# EAGLE board keyb (EAGLE 7.2.0)
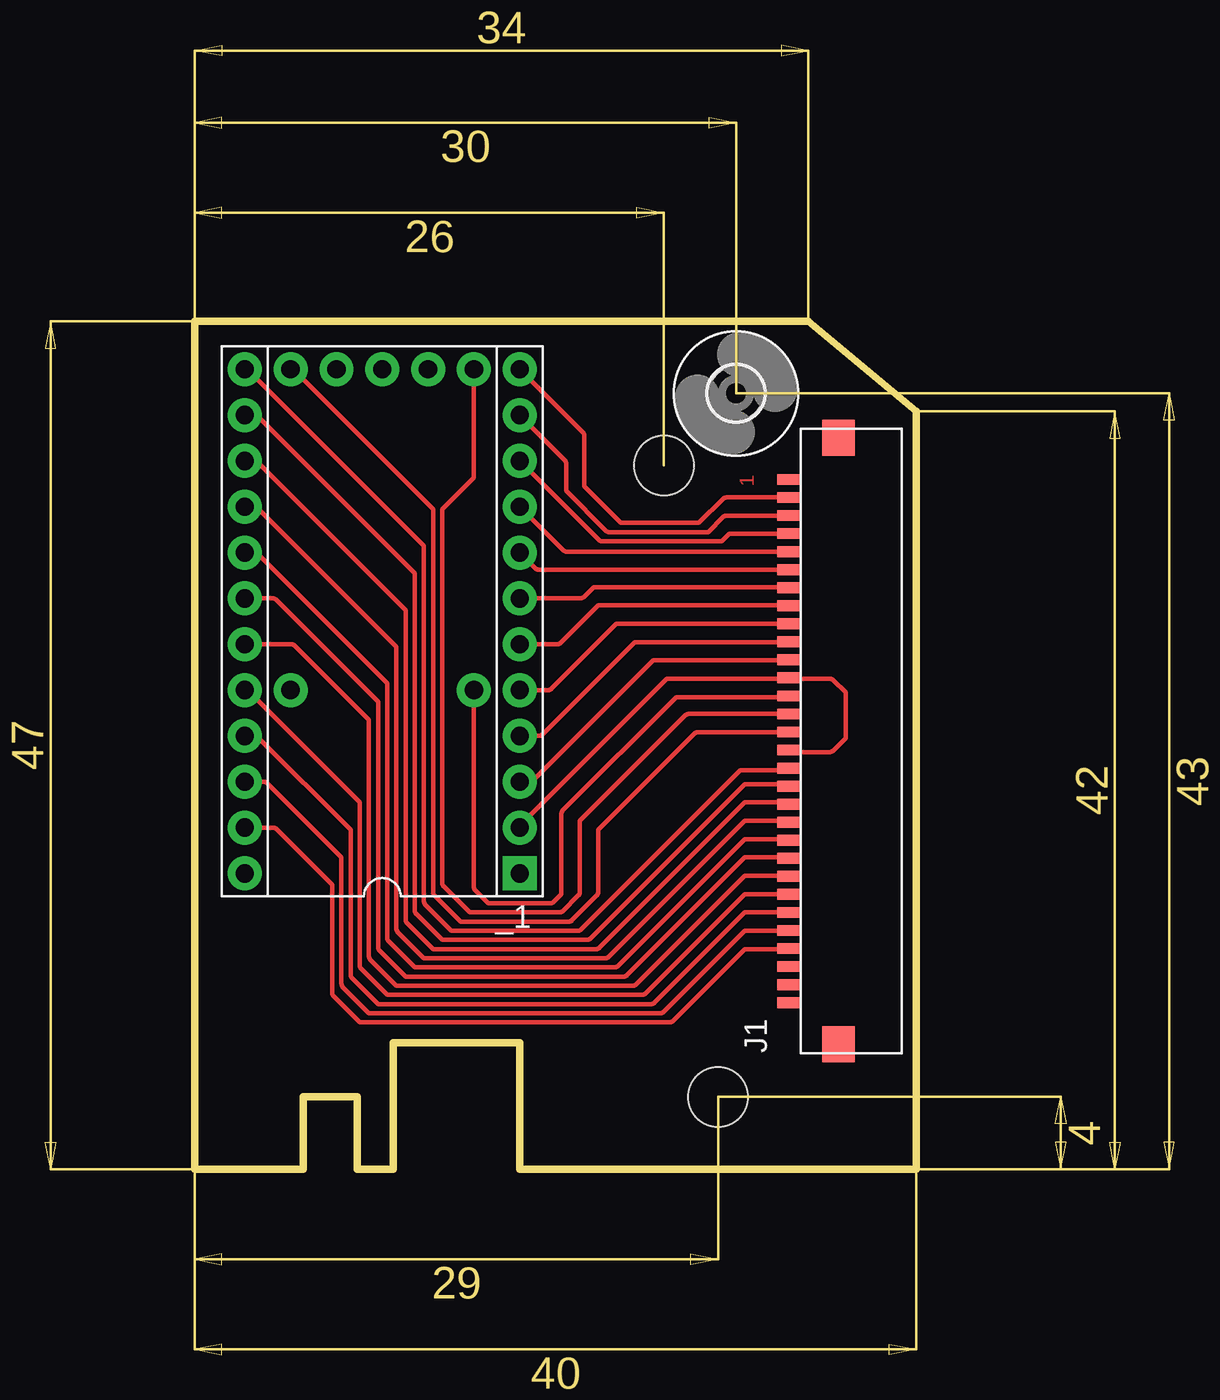
[diagram p0: board, top side]

Size 40 x 47 mm. Coordinates in mm from the lower left corner, seen from the top.
Outline: 0,0 0,47 34,47 40,42 40,0 18,0 18,7 11,7 11,0 9,0 9,4 6,4 6,0 0,0
Copper layers (1*16): Top 0.035mm / dielectric 1.5mm / Bottom 0.035mm
Design rules "default": minimum track width 10mil, minimum drill 24mil, track to track 8mil, track to pad 8mil, pad to pad 8mil, via to via 8mil, smd to smd 8mil, copper to edge 40mil, drill to drill 8mil, minimum pad ring 10mil, minimum via ring 8mil, stop-mask expansion 4mil, vias tented up to drill 0mil, thermal gap 10mil

## Footprints (pad centres in the part's own frame; a part is rotated, then mirrored left to right if it is on the bottom)
TEENSY = drill 1.016 pad 1.88: 5V2 13.97,-2.54; +5V -13.97,7.62; B0 -11.43,-7.62; B1 -8.89,-7.62; B2 -6.35,-7.62; B3 -3.81,-7.62; B4 8.89,7.62; B5 6.35,7.62; B6 3.81,7.62; B7 -1.27,-7.62; C6 11.43,-7.62; C7 13.97,-7.62; D0 1.27,-7.62; D1 3.81,-7.62; D2 6.35,-7.62; D3 8.89,-7.62; D4 13.97,5.08; D5 13.97,-5.08; D6 13.97,7.62; D7 11.43,7.62; E6 -3.81,-5.08; F0 -11.43,7.62; F1 -8.89,7.62; F4 -6.35,7.62; F5 -3.81,7.62; F6 -1.27,7.62; F7 1.27,7.62; GRND1 13.97,0; REF -3.81,5.08; RST 13.97,2.54 | drill 1.016 pad 1.88 square: GND -13.97,-7.62
686130148922 = smd 0.6 x 1.3: 1 -14.5,0; 2 -13.5,0; 3 -12.5,0; 4 -11.5,0; 5 -10.5,0; 6 -9.5,0; 7 -8.5,0; 8 -7.5,0; 9 -6.5,0; 10 -5.5,0; 11 -4.5,0; 12 -3.5,0; 13 -2.5,0; 14 -1.5,0; 15 -0.5,0; 16 0.5,0; 17 1.5,0; 18 2.5,0; 19 3.5,0; 20 4.5,0; 21 5.5,0; 22 6.5,0; 23 7.5,0; 24 8.5,0; 25 9.5,0; 26 10.5,0; 27 11.5,0; 28 12.5,0; 29 13.5,0; 30 14.5,0 | smd 2 x 1.8: Z1 -16.8,-2.75; Z2 16.8,-2.75
STAND-OFF = hole 3.302: 0,0
3,0 = hole 3: 0,0

## Placement (x,y rotation side)
_1  TEENSY  [TEENSY]  10.39,30.36 90 top
J1  686130148922  [686130148922]  32.94,23.73 90 top
U$1  [STAND-OFF]  26,39 0 top
U$2  [STAND-OFF]  29,4 0 top
U$3  [3,0]  30,43 0 top

## Library data of the parts
_1 = teensy
J1 = FPC_Connectors_Flat_Flexible_Cable_rev15c
U$1 U$2 = SparkFun-Electromechanical
U$3 = holes

## Nets
N$1: _1.C7 J1.29
N$2: _1.C6 J1.28
N$3: _1.D3 J1.27
N$4: _1.D2 J1.26
N$5: _1.D1 J1.25
N$6: _1.D0 J1.24
N$7: _1.B7 J1.23
N$8: _1.B3 J1.22
N$9: _1.B2 J1.21
N$10: _1.B1 J1.20
N$12: _1.B0 J1.15 J1.19
N$13: _1.E6 J1.18
N$14: _1.D5 J1.17
N$15: _1.D4 J1.16
N$16: _1.D6 J1.14
N$17: _1.D7 J1.13
N$18: _1.B4 J1.12
N$19: _1.B5 J1.11
N$20: _1.B6 J1.10
N$21: _1.F7 J1.9
N$22: _1.F6 J1.8
N$23: _1.F5 J1.7
N$24: _1.F4 J1.6
N$25: _1.F1 J1.5
N$26: _1.F0 J1.4

## Tracks (layer width: path | path; a pad name or v marks a point on that pad's centre or on a via)
N$1
  Top 0.254: _1.C7 21.52,40.82 arc-45 21.59,40.65 21.59,37.85 23.55,35.89 arc45 23.73,35.81 27.94,35.81 29.28,37.15 arc-45 29.46,37.23 J1.29
N$2
  Top 0.254: _1.C6 20.5,39.3 arc-45 20.57,39.12 20.57,37.59 22.79,35.38 arc45 22.96,35.31 28.45,35.31 29.29,36.15 arc-45 29.47,36.23 J1.28
N$3
  Top 0.254: _1.D3 22.39,34.87 arc45 22.57,34.8 29.21,34.8 29.56,35.15 arc-45 29.74,35.23 J1.27
N$4
  Top 0.254: _1.D2 20.42,34.3 arc45 20.6,34.23 J1.26
N$5
  Top 0.254: _1.D1 18.88,33.3 arc45 19.06,33.23 J1.25
N$6
  Top 0.254: _1.D0 21.36,31.63 arc45 21.54,31.7 22.1,32.26 32.85,32.26 arc-45 J1.24
N$7
  Top 0.254: _1.B7 20.09,29.09 arc45 20.27,29.16 22.35,31.24 32.89,31.24 arc-45 J1.23
N$8
  Top 0.254: _1.B3 19.59,26.55 arc45 19.77,26.62 23.37,30.23 J1.22 arc-45 J1.22
N$9
  Top 0.254: _1.B2 19.08,24.01 arc45 19.26,24.08 24.38,29.21 32.9,29.21 arc45 J1.21
N$10
  Top 0.254: _1.B1 18.57,21.47 arc45 18.75,21.54 25.4,28.19 32.86,28.19 arc45 J1.20
N$12
  Top 0.254: J1.15 32.97,23.19 arc45 33.15,23.11 35.2,23.11 arc45 35.38,23.19 36.07,23.88 36.07,26.42 35.38,27.1 arc45 35.2,27.18 32.82,27.18 | _1.B0 arc-45 18.08,19.09 26.16,27.18 32.82,27.18 | 32.82,27.18 arc45 J1.19
N$13
  Top 0.254: _1.E6 15.47,15.62 arc45 15.54,15.44 16.26,14.73 19.71,14.73 arc45 19.89,14.81 20.32,15.24 20.32,19.71 arc-45 20.39,19.89 26.67,26.16 32.78,26.16 arc45 J1.18
N$14
  Top 0.254: _1.D5 15.47,38.44 arc-45 15.4,38.26 13.72,36.58 13.72,15.85 arc45 13.79,15.67 15.24,14.22 20.21,14.22 arc45 20.39,14.3 21.26,15.17 arc45 21.34,15.35 21.34,19.3 27.18,25.15 arc-45 27.36,25.23 J1.17 J1.17 arc-45 32.75,25.15
N$15
  Top 0.254: _1.D4 5.35,44.33 arc-45 5.53,44.26 13.21,36.58 13.21,15.35 arc45 13.28,15.17 14.73,13.72 20.72,13.72 arc45 20.9,13.79 22.28,15.17 arc45 22.35,15.35 22.35,18.8 27.71,24.15 arc-45 27.89,24.23 J1.16 32.91,24.2 | 32.91,24.2 arc-45 32.73,24.13 arc45 32.91,24.2
N$16
  Top 0.254: _1.D6 2.81,44.33 arc-45 2.99,44.26 12.7,34.54 12.7,14.84 arc45 12.77,14.66 14.22,13.21 21.23,13.21 arc45 21.41,13.28 30.23,22.1 32.7,22.1 arc45 32.88,22.17 J1.14
N$17
  Top 0.254: _1.D7 3.32,41.79 arc-45 3.5,41.72 12.19,33.02 12.19,14.33 arc45 12.27,14.15 13.72,12.7 21.74,12.7 arc45 21.92,12.77 30.48,21.34 32.72,21.34 arc-45 32.9,21.26 J1.13
N$18
  Top 0.254: _1.B4 3.32,39.25 arc-45 3.5,39.18 11.68,30.99 11.68,13.82 arc45 11.76,13.64 13.21,12.19 22.25,12.19 arc45 22.43,12.27 30.48,20.32 32.73,20.32 arc-45 32.91,20.25 J1.12
N$19
  Top 0.254: _1.B5 3.32,36.71 arc-45 3.5,36.64 11.18,28.96 11.18,13.31 arc45 11.25,13.13 12.7,11.68 22.75,11.68 arc45 22.93,11.76 30.48,19.3 32.75,19.3 arc-45 J1.11
N$20
  Top 0.254: _1.B6 3.32,34.17 arc-45 3.5,34.1 10.67,26.92 10.67,12.8 arc45 10.74,12.63 12.19,11.18 23.26,11.18 arc45 23.44,11.25 30.48,18.29 32.78,18.29 arc-45 J1.10
N$21
  Top 0.254: _1.F7 4.33,31.63 arc-45 4.51,31.56 10.16,25.91 10.16,12.3 arc45 10.23,12.12 11.68,10.67 23.77,10.67 arc45 23.95,10.74 30.48,17.27 32.82,17.27 arc-45 J1.9
N$22
  Top 0.254: _1.F6 5.35,29.09 arc-45 5.53,29.02 9.65,24.89 9.65,11.79 arc45 9.73,11.61 11.18,10.16 24.28,10.16 arc45 24.46,10.23 30.48,16.26 32.86,16.26 arc-45 J1.8
N$23
  Top 0.254: _1.F5 2.81,26.55 arc-45 2.99,26.48 9.14,20.32 9.14,11.28 arc45 9.22,11.1 10.67,9.65 24.79,9.65 arc45 24.97,9.73 30.48,15.24 32.9,15.24 arc-45 J1.7
N$24
  Top 0.254: _1.F4 3.32,24.01 arc-45 3.5,23.94 8.64,18.8 8.64,10.77 arc45 8.71,10.59 10.16,9.14 25.3,9.14 arc45 25.47,9.22 30.48,14.22 J1.6 arc45 J1.6
N$25
  Top 0.254: _1.F1 3.83,21.47 arc-45 4,21.4 8.13,17.27 8.13,10.27 arc45 8.2,10.09 9.65,8.64 25.8,8.64 arc45 25.98,8.71 30.48,13.21 32.89,13.21 arc45 J1.5
N$26
  Top 0.254: _1.F0 4.33,18.93 arc-45 4.51,18.86 7.62,15.75 7.62,9.76 arc45 7.69,9.58 9.14,8.13 26.31,8.13 arc45 26.49,8.2 30.48,12.19 32.85,12.19 arc45 J1.4

## Text on the board
Top: 1